# Altium PCB GRAVITAS_ZONE_SENSOR.PcbDoc
Units mil, origin at the board's own origin, x right, y up, seen from the top; angles counter-clockwise.
Board outline 1575 x 2750 mil, 4 copper layers (Top Layer, Power, Ground, Bottom Layer), stack 23.756 mil thick; 83 components, 49 nets, 274 pads, 107 vias.
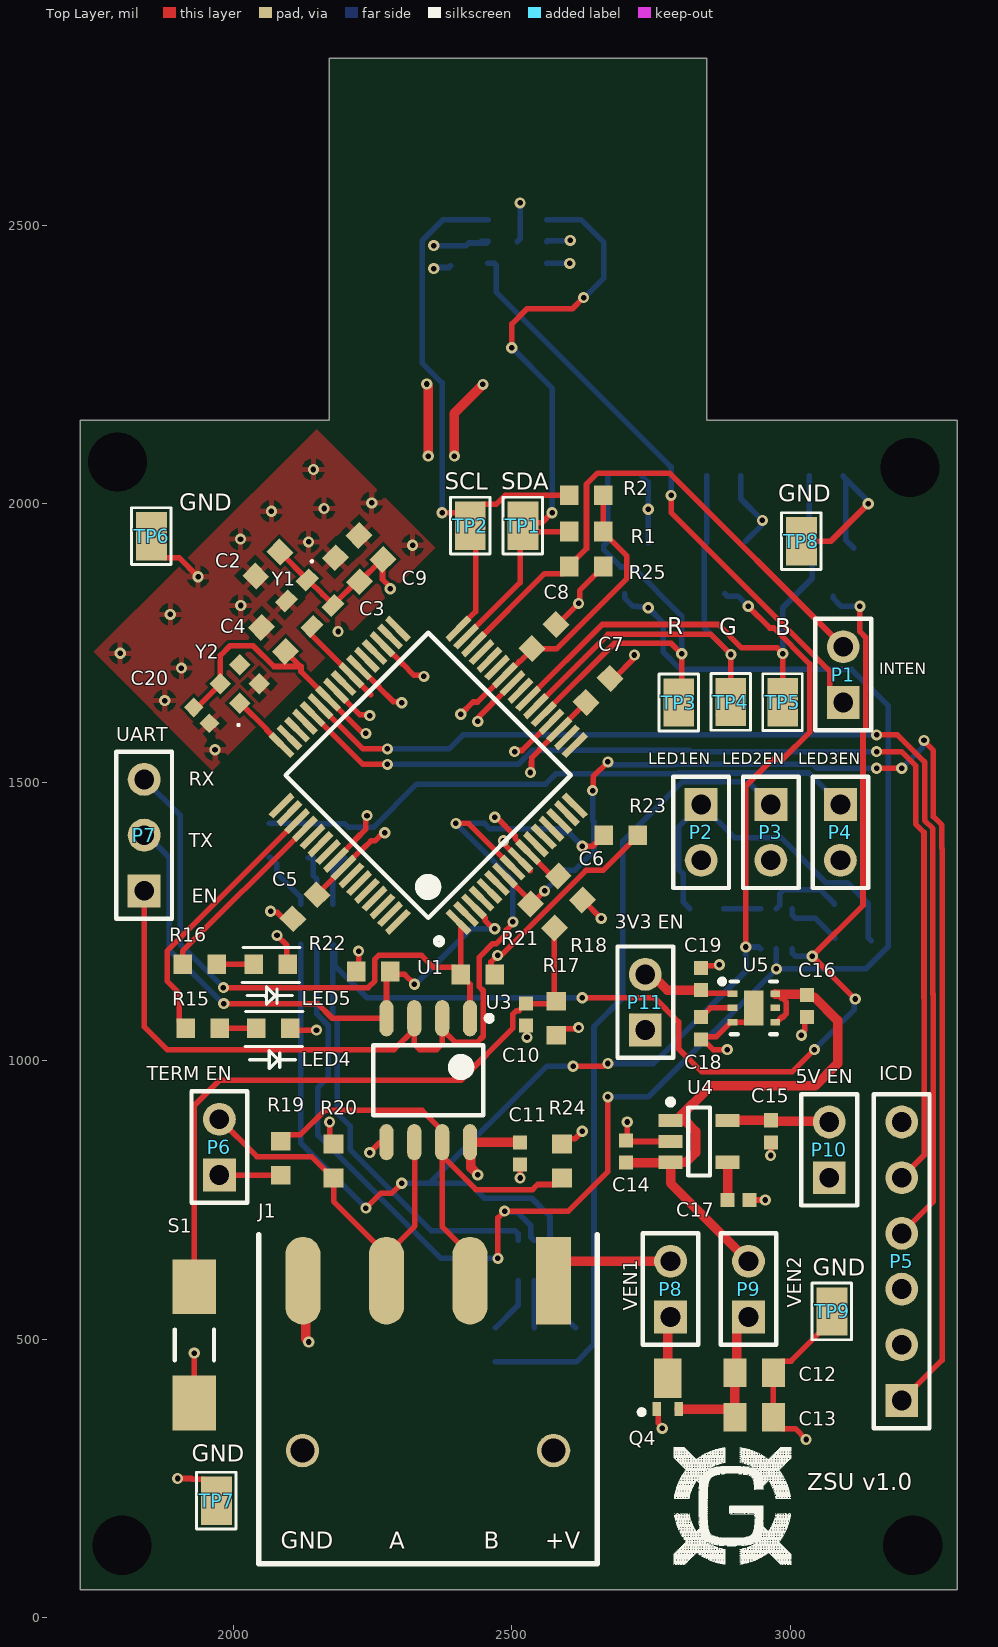
[diagram p0: Top Layer view]
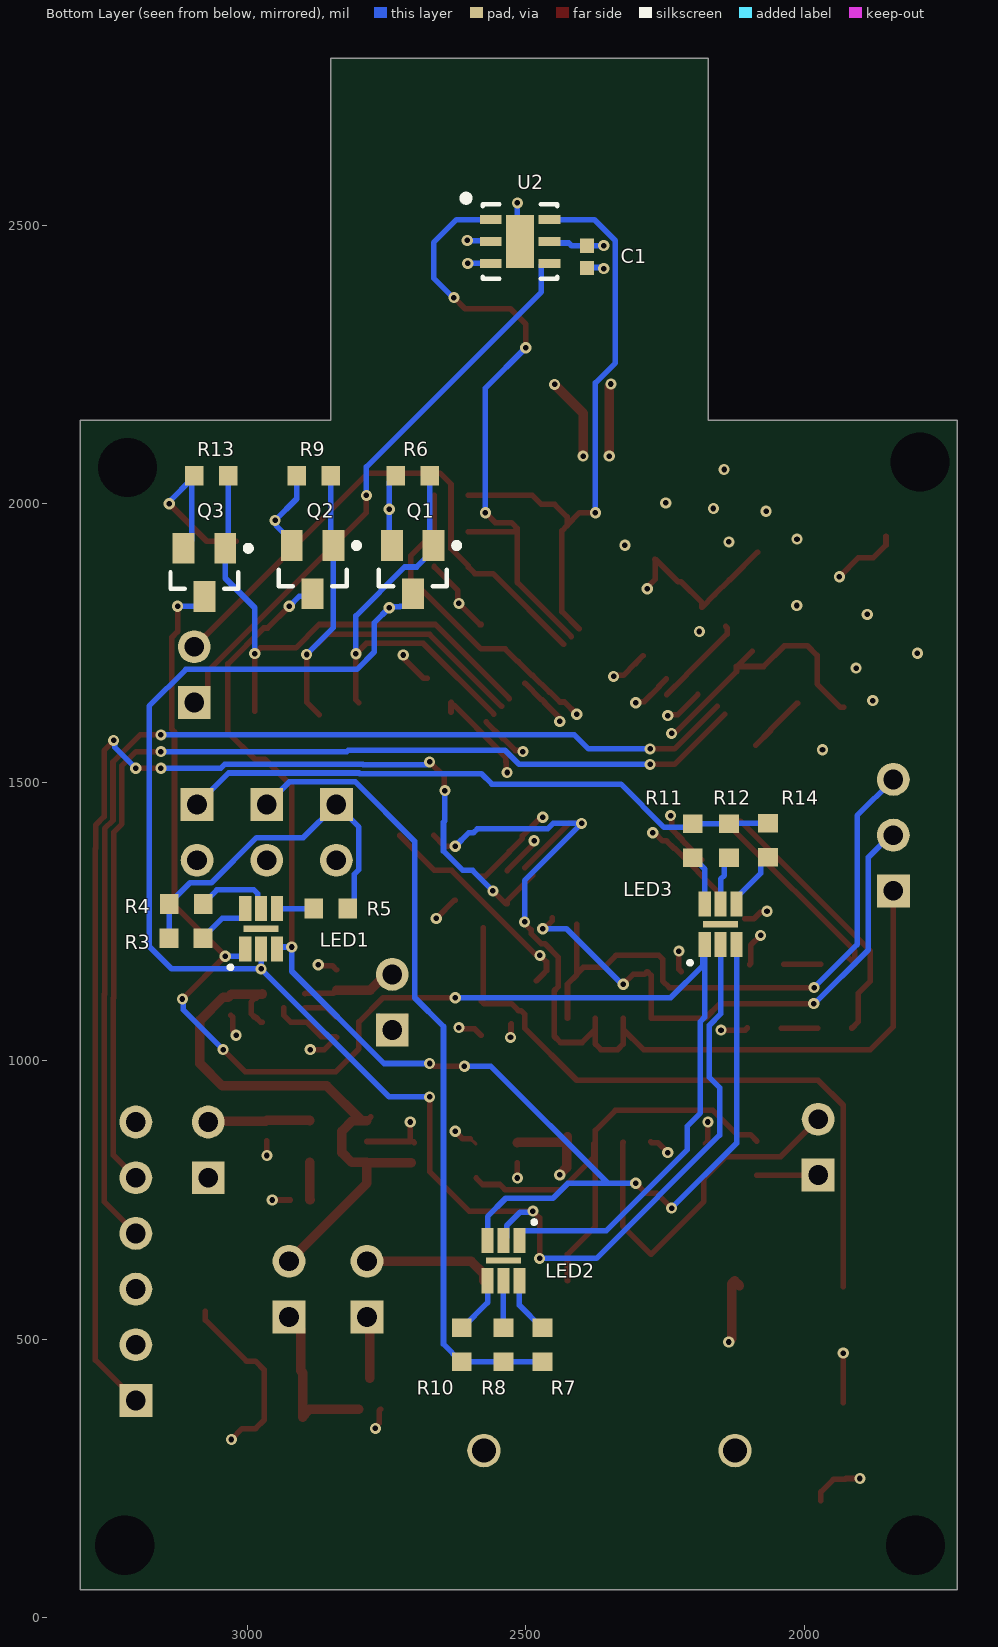
[diagram p1: Bottom Layer view, seen from below]
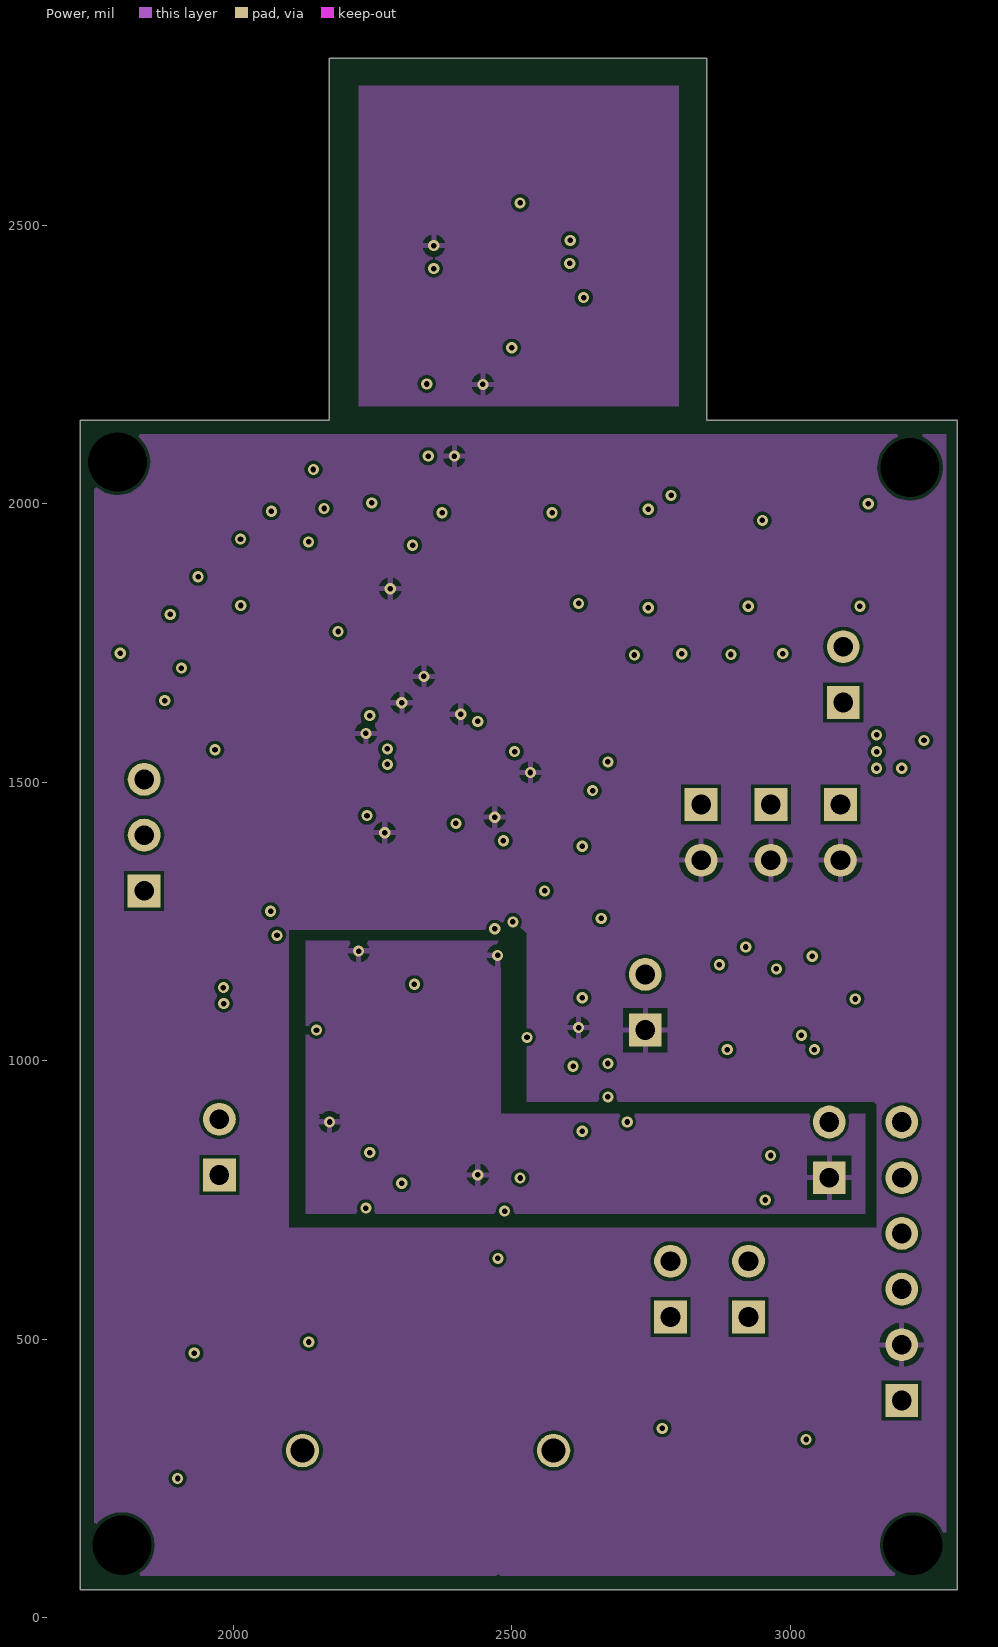
[diagram p2: Power]
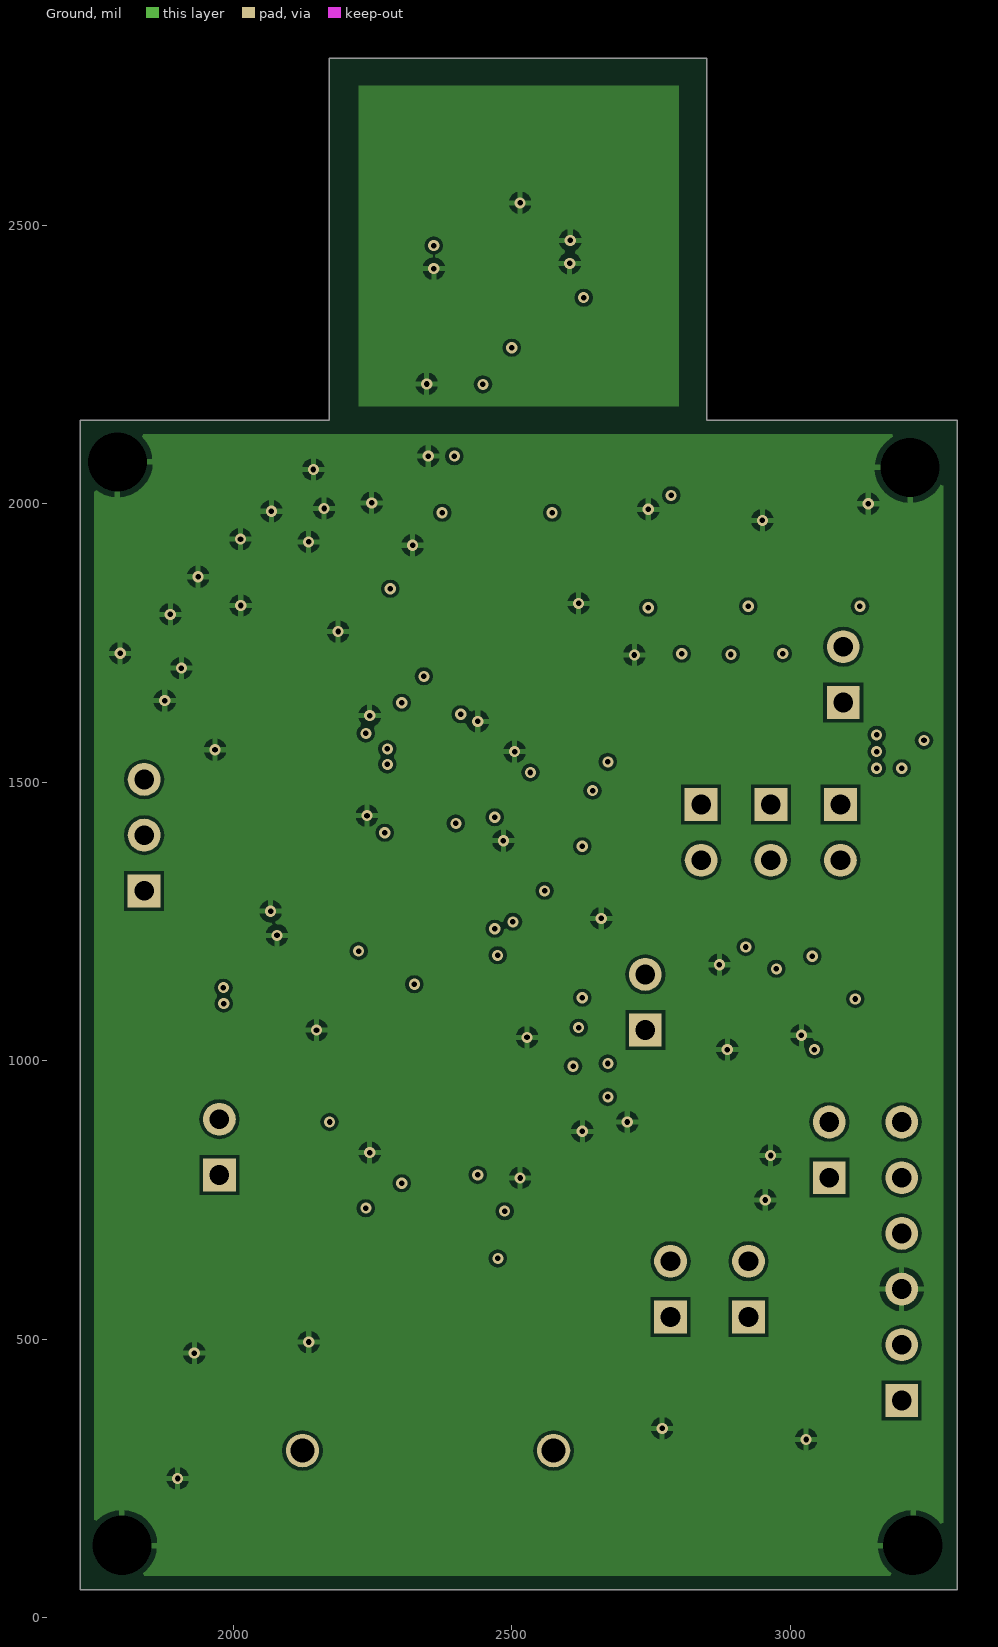
[diagram p3: Ground]

## Layer stack, top to bottom
Top Solder: solder mask 0.4, Solder Resist, Dk 3.5
Top Layer: signal copper 1.4
Dielectric 2: prepreg 2.8, PP-006, Dk 4.1
Power: signal copper 1.3778
Dielectric 1: dielectric 12.6, FR-4, Dk 4.8
Ground: signal copper 1.3778
Dielectric 3: prepreg 2.8, PP-006, Dk 4.1
Bottom Layer: signal copper 1.4
Bottom Solder: solder mask 0.4, Solder Resist, Dk 3.5

## Board outline
1725,50 1725,2150 2171.96,2150 2171.96,2800 2850,2800 2850,2150 3300,2150 3300,50

## Design rules (kind name [scope] priority, off if disabled: settings)
Clearance [All] p1: gap=6 ignorepadtopadclearanceinfootprint=FALSE except(0: Arc-Hole Track-Hole SMDPad-Hole THPad-Hole Via-Hole Fill-Hole Poly-Hole Region-Hole Text-Hole)
DiffPairsRouting "Schematic Differential Pairs Routing_3" [InNet('NetJ1_3')] p1: maxlimit=10 minlimit=10 mostfreqgap=10 toplayer_minwidth=15 toplayer_maxwidth=15 toplayer_prefwidth=15 midlayer1_minwidth=15 midlayer1_maxwidth=15 midlayer1_prefwidth=15 midlayer2_minwidth=15 midlayer2_maxwidth=15 midlayer2_prefwidth=15 bottomlayer_minwidth=15 bottomlayer_maxwidth=15 bottomlayer_prefwidth=15 maxuncoupledlength=500
DiffPairsRouting "Schematic Differential Pairs Routing_2" [InNet('NetJ1_2')] p2: maxlimit=10 minlimit=10 mostfreqgap=10 toplayer_minwidth=15 toplayer_maxwidth=15 toplayer_prefwidth=15 midlayer1_minwidth=15 midlayer1_maxwidth=15 midlayer1_prefwidth=15 midlayer2_minwidth=15 midlayer2_maxwidth=15 midlayer2_prefwidth=15 bottomlayer_minwidth=15 bottomlayer_maxwidth=15 bottomlayer_prefwidth=15 maxuncoupledlength=500
DiffPairsRouting [All] p3: maxlimit=10 minlimit=10 mostfreqgap=10 toplayer_minwidth=15 toplayer_maxwidth=15 toplayer_prefwidth=15 midlayer1_minwidth=15 midlayer1_maxwidth=15 midlayer1_prefwidth=15 midlayer2_minwidth=15 midlayer2_maxwidth=15 midlayer2_prefwidth=15 bottomlayer_minwidth=15 bottomlayer_maxwidth=15 bottomlayer_prefwidth=15 maxuncoupledlength=500
PolygonConnect [All] p1: connectstyle=Relief reliefconductorwidth=10 reliefentries=4 polygonreliefangle="90 Angle" airgapwidth=10
RoutingVias [All] p1: holewidth=10 width=20 viastyle="Through Hole" minholewidth=10 minwidth=20 maxholewidth=50 maxwidth=60
SolderMaskExpansion [All] p1: expansion=4
Width [All] p1: maxlimit=17 minlimit=6 preferedwidth=10 midlayer1_minwidth=10 midlayer1_maxwidth=10 midlayer2_minwidth=10 midlayer2_maxwidth=10 minimp=50.000000 maximp=50.000000 favimp=50.000000
29 further rules are at their usual default settings.

## Classes and differential pairs
component class VREG_RS485_ZS: C11 C12 C13 C14 C15 C16 C17 C18 C19 J1 P6 P7 P8 P9 P10 P11 Q4 R19 R20 R21 R22 R23 R24 TP6 TP7 TP8 TP9 U3 U4 U5
component class MCU_SUPPORT_ZS: C2 C3 C4 C5 C6 C7 C8 C9 C10 C20 LED4 LED5 P5 R15 R16 R17 R18 S1 Y1 Y2
component class LEDS_SENSOR_ZS: C1 LED1 LED2 LED3 P1 P2 P3 P4 Q1 Q2 Q3 R1 R2 R3 R4 R5 R6 R7 R8 R9 R10 R11 R12 R13 R14 R25 TP1 TP2 TP3 TP4 TP5 U1 U2

## Components (designator, comment, footprint, x,y, rotation, side; value= is the part's Value field where it differs from the comment)
C1 "0.1uF" NonPolar-0402 2390,2445 r90 bottom
C2 "0.1uF" NonPolar-0603 2061.94,1891.44 r45 top
C3 "0.1uF" NonPolar-0603 2204.85,1881.44 r315 top
C4 "0.1uF" NonPolar-0603 2071.94,1756.44 r315 top
C5 "0.1uF" NonPolar-0603 2128.42,1276.46 r45 top
C6 "0.1uF" NonPolar-0603 2605,1310 r135 top
C7 "0.1uF" NonPolar-0603 2655,1665 r225 top
C8 "0.1uF" NonPolar-0603 2557.93,1761.58 r225 top
C9 "0.1uF" NonPolar-0603 2246.94,1921.44 r315 top
C10 "100nF" NonPolar-0402 2525.64,1084.54 r90 top
C11 "0.1uF" NonPolar-0402 2515,835 r90 top
C12 "10uF" NonPolar-0805 2935,440 r180 top
C13 "10uF" NonPolar-0805 2935,360 r180 top
C14 "1uF" NonPolar-0402 2705.35,835 r270 top
C15 "4.7uF" NonPolar-0402 2965,875 r90 top
C16 "1uF" NonPolar-0402 3029.69,1100 r90 top
C17 "10nF" NonPolar-0402 2905,750 r180 top
C18 "0.01uF" NonPolar-0402 2839.69,1060 r90 top
C19 "2.2uF" NonPolar-0402 2839.69,1145 r270 top
C20 "0.1uF" NonPolar-0402 1941.94,1621.44 r135 top
J1 "1824653" 1824653 2575,605.12 r180 top
LED1 "RGB_LED_19-337" RGB_LED_19-337 2975,1236.92 r90 bottom
LED2 "RGB_LED_19-337" RGB_LED_19-337 2540,641.22 r270 bottom
LED3 "RGB_LED_19-337" RGB_LED_19-337 2150,1245 r90 bottom
LED4 "LED-0603" LED-0603 2070,1058.35 r0 top
LED5 "LED-0603" LED-0603 2065,1173.35 r0 top
P1 "Header 2" HDR1X2 3095,1643.24 r90 top
P2 "Header 2" HDR1X2 2840,1460 r270 top
P3 "Header 2" HDR1X2 2965,1460 r270 top
P4 "Header 2" HDR1X2 3090,1460 r270 top
P5 "Header 6" HDR1X6 3200,390 r90 top
P6 "Header 2" HDR1X2 1975,795 r90 top
P7 "Header 3" HDR1X3 1840,1305 r90 top
P8 "Header 2" HDR1X2 2785,540 r90 top
P9 "Header 2" HDR1X2 2925,540 r90 top
P10 "Header 2" HDR1X2 3070,790 r90 top
P11 "Header 2" HDR1X2 2739.69,1055 r90 top
Q1 "BSS138" BSS138-SOT23 2702.6,1881.69 r270 bottom
Q2 "BSS138" BSS138-SOT23 2882.6,1881.69 r270 bottom
Q3 "BSS138" BSS138-SOT23 3076.81,1876.69 r270 bottom
Q4 "P_Channel_DMG3415UFY4Q-7" P_Channel_DMG3415UFY4Q-7_attempt1 2780,410 r90 top
R1 "5k" NonPolar-0603 2633.42,1950 r0 top
R2 "5k" NonPolar-0603 2633.42,2015 r0 top
R3 "12R" NonPolar-0603 3110,1220 r180 bottom
R4 "47R" NonPolar-0603 3109.49,1281.22 r180 bottom
R5 "12R" NonPolar-0603 2850,1273.14 r0 bottom
R6 "10k" NonPolar-0603 2702.6,2050 r180 bottom
R7 "12R" NonPolar-0603 2470,490 r90 bottom
R8 "47R" NonPolar-0603 2540,490 r90 bottom
R9 "10k" NonPolar-0603 2880.51,2050 r180 bottom
R10 "12R" NonPolar-0603 2615,490 r90 bottom
R11 "12R" NonPolar-0603 2200,1395 r270 bottom
R12 "47R" NonPolar-0603 2135,1395 r270 bottom
R13 "10k" NonPolar-0603 3064.34,2050 r180 bottom
R14 "12R" NonPolar-0603 2065,1395.51 r270 bottom
R15 "220R" NonPolar-0603 1945,1058.35 r0 top
R16 "220R" NonPolar-0603 1939.49,1173.35 r0 top
R17 "10k" NonPolar-0603 2580,1076.22 r270 top
R18 "220R" NonPolar-0603 2555,1260 r315 top
R19 "120R" NonPolar-0603 2085,825 r90 top
R20 "20k" NonPolar-0603 2180,820 r90 top
R21 "10k" NonPolar-0603 2438.92,1155 r0 top
R22 "10k" NonPolar-0603 2251.34,1160 r180 top
R23 "10k" NonPolar-0603 2695.88,1405 r0 top
R24 "20k" NonPolar-0603 2590,820 r270 top
R25 "10k" NonPolar-0603 2633.42,1887.27 r180 top
S1 "Switch-147873-1" "Switch - 147873-1" 1930,490 r270 top
TP1 "TestPoint" "TP - S2751-46R" 2520,1960.58 r90 top
TP2 "TestPoint" "TP - S2751-46R" 2425.67,1960.58 r90 top
TP3 "TestPoint" "TP - S2751-46R" 2800,1642.93 r90 top
TP4 "TestPoint" "TP - S2751-46R" 2893.35,1643.94 r90 top
TP5 "TestPoint" "TP - S2751-46R" 2986.49,1643.42 r90 top
TP6 "TestPoint" "TP - S2751-46R" 1853.18,1941.44 r90 top
TP7 "TestPoint" "TP - S2751-46R" 1970,210 r90 top
TP8 "TestPoint" "TP - S2751-46R" 3020,1932.64 r90 top
TP9 "TestPoint" "TP - S2751-46R" 3075,550 r90 top
U1 "PIC32MK0512GPD064-I/PTX" V2_PIC32MK0512GPD064IPT 2349.84,1512.4 r135 top
U2 "HDC2080" HDC2080 2510,2470.73 r180 bottom
U3 "MAX485CSA+" MAXM-MAX485CSA+-8_M 2350,965 r270 top
U4 "5V_LDO_LP2992IM5-5.0/NOPB" LP2992IM5-5.0/NOPB 2836.18,855 r0 top
U5 "3V3_LDO_TPS73533" TPS73533DRVT 2934.69,1095 r0 top
Y1 "12MHz_DSC1001DE2-012.0000" 12MHz_DSC1001DE2-012.0000 2136.94,1821.44 r315 top
Y2 "32.768kHz_DSC6083JE2A-032K768" 32.768kHz_DSC6083JE2A-032K768 2072.98,1680.62 r45 top

## Footprints (in the part's own frame and the unit in brackets; to place one, negate y for a bottom-side part, rotate by r counter-clockwise, add the part's x,y. Pads: shape width x height; smd on the part's side, far side on the other; paste and mask are expansions set on the pad)
12MHz_DSC1001DE2-012.0000 [mm]
  rect 0.65x0.85 smd: 1(-0.825,0.675) 2(-0.825,-0.675) 3(0.825,-0.675) 4(0.825,0.675)
  silkscreen extent -1.32,1.38 -1.23,1.47, body extent -1.28,-1.02 1.27,1.03, height 0.9
32.768kHz_DSC6083JE2A-032K768 [mm]
  rect 0.7x0.7 smd: 1(-1.8,0.4) 2(-0.55,0.4) 3(-0.55,1.65) 4(-1.8,1.65)
  silkscreen extent -2.59,-0.3 -2.49,-0.2, body extent -2.42,0.02 0.08,2.02, height 0.89
1824653 [mm]
  rect 1.6x4 smd: 1(0,0)
  oval 1.6x4 smd: 2(3.81,0) 3(7.62,0) 4(11.43,0)
  round 1.524 hole 1.1: 5(0,7.75) 6(11.45,7.75)
  silkscreen extent -2,-2.1 13.45,12.9, body extent -1.98,-2.21 13.45,12.96, height 7.7
BSS138-SOT23 [mm]
  rect 1.4x1 smd: 1(-1.1,0.95) 2(-1.1,-0.95) 3(1.1,0)
  silkscreen extent -1.22,-1.55 0.75,2.12, body extent -1.42,-1.5 1.42,1.5, height 1.2
HDC2080 [mm] "SON, 6-Leads, Body 3.00x3.00mm, Pitch 1.00mm, Thermal Pad 2.40x1.28mm, IPC Medium Density"
  rect 1x0.4 smd: 1(-1.34,1) 2(-1.34,0) 3(-1.34,-1) 4(1.34,-1) 5(1.34,0) 6(1.34,1)
  rect 1.28x2.4 smd: 7(0,0)
  silkscreen extent -2.67,-1.7 1.7,2.17, body extent -1.55,-1.55 1.55,1.55, height 0.8
HDR1X2 [mm] "Connector; Header; 2 Position"
  rect 1.5x1.5 hole 0.9: 1(0,0)
  round 1.5 hole 0.9: 2(2.54,0)
  silkscreen extent -1.27,-1.27 3.81,1.27
HDR1X3 [mm] "Connector; Header; 3 Position"
  rect 1.5x1.5 hole 0.9: 1(0,0)
  round 1.5 hole 0.9: 2(2.54,0) 3(5.08,0)
  silkscreen extent -1.27,-1.27 6.35,1.27
HDR1X6 [mm] "Connector; Header; 6 Position"
  rect 1.5x1.5 hole 0.9: 1(0,0)
  round 1.5 hole 0.9: 2(2.54,0) 3(5.08,0) 4(7.62,0) 5(10.16,0) 6(12.7,0)
  silkscreen extent -1.27,-1.27 13.97,1.27
LED-0603 [mm]
  rect 0.85x0.9 smd: 1(-0.725,0) 2(0.825,0)
  silkscreen extent -1.24,-1.84 1.39,0.76, body extent -0.8,-0.45 0.9,0.45, height 0.6
LP2992IM5-5.0/NOPB [mm]
  rect 1.1x0.6 smd: 1(-1.3,0.95) 2(-1.3,0) 3(-1.3,-0.95) 4(1.3,-0.95) 5(1.3,0.95)
  silkscreen extent -1.42,-1.55 0.5,1.92, body extent -1.42,-1.5 1.42,1.5, height 1.2
MAXM-MAX485CSA+-8_M [mm] "SOIC, 8-Leads, Body 5x4mm, Pitch 1.27mm, IPC Low Density"
  oval 1.65x0.65 smd: 1(-2.825,1.905) 2(-2.825,0.635) 3(-2.825,-0.635) 4(-2.825,-1.905) 5(2.825,-1.905) 6(2.825,-0.635) 7(2.825,0.635) 8(2.825,1.905)
  silkscreen extent -2.95,-2.5 1.6,2.91, body extent -2,-2.5 2,2.5, height 1.75
NonPolar-0402 [mm]
  rect 0.64x0.64 smd: 1(-0.55,0) 2(0.46,0)
  body extent -0.55,-0.3 0.55,0.3, height 0.7
NonPolar-0603 [mm] "Chip Resistor, 2-Leads, Body 1.60x0.80mm, IPC Medium Density"
  rect 0.85x0.9 smd: 1(-0.775,0) 2(0.775,0)
  body extent -0.85,-0.45 0.85,0.45, height 0.6
NonPolar-0805 [mm] "Chip Resistor, 2-Leads, Body 2.00x1.20mm, IPC Medium Density"
  rect 1.05x1.3 smd: 1(-0.875,0) 2(0.875,0)
  body extent -1.05,-0.65 1.05,0.65, height 0.6
P_Channel_DMG3415UFY4Q-7_attempt1 [mm] "DFN, 3-Leads, Body 1.51x2.01mm, Pitch 1.40mm, IPC Medium Density"
  rect 0.65x0.4 smd: 1(-0.9,0.5) 2(-0.9,-0.5)
  rect 1.8x1.25 smd: 3(0.5,0)
  silkscreen extent -1.18,1.01 -0.91,1.32, body extent -1.04,-0.79 1.04,0.79, height 0.4
RGB_LED_19-337 [mm]
  rect 1.15x0.55 smd: 1(-0.92,0.725) 2(-0.92,0) 3(-0.92,-0.725) 4(0.92,0.725) 5(0.92,0) 6(0.92,-0.725)
  rect 0.29x1.6 smd: 7(0,0)
  silkscreen extent -1.88,1.27 -1.63,1.53, body extent -0.8,-0.8 0.8,0.8, height 0.2
"Switch - 147873-1" [mm]
  rect 2.5x2 smd: 1(-2.65,0) 2(2.65,0)
  silkscreen extent -0.7,-0.9 0.7,0.9, body extent -3.8,-1.05 3.8,1.05, height 3
"TP - S2751-46R" [mm]
  rect 2.2x1.4 smd: 1(0,0)
  silkscreen extent -1.29,-0.89 1.3,0.91, body extent -1,-0.6 1,0.6, height 1.4
TPS73533DRVT [mm]
  rect 0.45x0.3 smd: 1(-0.975,0.65) 2(-0.975,0) 3(-0.975,-0.65) 4(0.975,-0.65) 5(0.975,0) 6(0.975,0.65)
  rect 0.89x1.6 smd: 7(0,0)
  silkscreen extent -1.58,-1.2 1.05,1.33, body extent -1.05,-1.05 1.05,1.05, height 0.8
V2_PIC32MK0512GPD064IPT [mm]
  rect 1.4x0.3 smd: 1(-5.7,3.75) 2(-5.7,3.25) 3(-5.7,2.75) 4(-5.7,2.25) 5(-5.7,1.75) 6(-5.7,1.25) 7(-5.7,0.75) 8(-5.7,0.25) 9(-5.7,-0.25) 10(-5.7,-0.75) 11(-5.7,-1.25) 12(-5.7,-1.75) 13(-5.7,-2.25) 14(-5.7,-2.75) 15(-5.7,-3.25) 16(-5.7,-3.75) 33(5.7,-3.75) 34(5.7,-3.25) 35(5.7,-2.75) 36(5.7,-2.25) 37(5.7,-1.75) 38(5.7,-1.25) 39(5.7,-0.75) 40(5.7,-0.25) 41(5.7,0.25) 42(5.7,0.75) 43(5.7,1.25) 44(5.7,1.75) 45(5.7,2.25) 46(5.7,2.75) 47(5.7,3.25) 48(5.7,3.75)
  rect 0.3x1.4 smd: 17(-3.75,-5.7) 18(-3.25,-5.7) 19(-2.75,-5.7) 20(-2.25,-5.7) 21(-1.75,-5.7) 22(-1.25,-5.7) 23(-0.75,-5.7) 24(-0.25,-5.7) 25(0.25,-5.7) 26(0.75,-5.7) 27(1.25,-5.7) 28(1.75,-5.7) 29(2.25,-5.7) 30(2.75,-5.7) 31(3.25,-5.7) 32(3.75,-5.7) 49(3.75,5.7) 50(3.25,5.7) 51(2.75,5.7) 52(2.25,5.7) 53(1.75,5.7) 54(1.25,5.7) 55(0.75,5.7) 56(0.25,5.7) 57(-0.25,5.7) 58(-0.75,5.7) 59(-1.25,5.7) 60(-1.75,5.7) 61(-2.25,5.7) 62(-2.75,5.7) 63(-3.25,5.7) 64(-3.75,5.7)
  silkscreen extent -5.85,-4.6 4.6,5.15, body extent -5,-5 5,5, height 1

## Part data
C1 C10 C11 C14 C15 C16 C17 C18 C19 C20: library part "Cap - 0402"
C2 C3 C4 C5 C6 C7 C8 C9: library part "Cap - 0603"
C12 C13: library part "Cap - 0805"
P1 P2 P3 P4 P6 P8 P9 P10 P11: "Header, 2-Pin", LatestRevisionDate=17-Jul-2002, LatestRevisionNote="Re-released for DXP Platform.", Publisher="Altium Limited"
P5: "Header, 6-Pin", LatestRevisionDate=17-Jul-2002, LatestRevisionNote="Re-released for DXP Platform.", Publisher="Altium Limited"
P7: "Header, 3-Pin", LatestRevisionDate=17-Jul-2002, LatestRevisionNote="Re-released for DXP Platform.", Publisher="Altium Limited"
R1 R2 R3 R4 R5 R6 R7 R8 R9 R10 R11 R12 R13 R14 R15 R16 R17 R18 R19 R20 R21 R22 R23 R24 R25: library part "Res - 0603"
TP1 TP2 TP3 TP4 TP5 TP6 TP7 TP8 TP9: "S2751-46R"
U3: library part CMP-2000-05211-1, "Low-Power, Slew-Rate-Limited RS-485/RS-422 Transceiver, 4.75 to 5.25 V, 0 to 70 degC, 8-Pin SOIC, RoHS, Tape and Reel", Digital IC Case Style=SOIC, IC Temperature Range=Commercial, Manufacturer=Maxim, Operating Temperature Max=70degC, Operating Temperature Min=0degC, Operating Temperature Range=0degCto+70degC, Supply Current=500µA, Supply Voltage Max=5.25V, Supply Voltage Min=4.75V, Supply Voltage Range=4.75Vto5.25V, Base Number=485, Data Rate=2.5Mbps, Datasheet URL=https://datasheet.ciiva.com/29306/170071-da-01-en-ic-max485csa-so8-29306144.pdf, Datasheet Version="Rev. 8, 10/2003", Device Marking=MAX485CSA+, Device Type=Transceiver, Driver Case Style=SOIC, IC Generic Number=485, Interface=RS-422/RS-485, Interface Type=RS422,RS485, Line / Bus Driver / Receiver / Transceiver Type=CMOSDifferential, Logic Function Number=485, Manufacturer URL=http://www.maximintegrated.com/, No. of Drivers=1, No. of Pins=8, No. of Receivers=1, Package / Case=SOIC, Transceiver Type=Differential

## Free pads (board coordinates)
  round 60 hole 106.3: 4(1791.94,2075) 5(3215,2065) 6(1800,130) 7(3220,130)

## Via types
v1: diameter 20, hole 10, Top Layer to Bottom Layer, 107 vias

## Nets (pads, with @x,y where several pads share a name; then routed paths per layer and width w, separated by ;. In a path a pad name is that pad's centre, name@x,y a point inside that pad or via, vN(x,y) a via of type N, cw(c..) or ccw(c..) an arc to the next point about the centre after c; other vN are vias at no path point)
3V3DC: C1.2 C2.2 C3.2 C4.2 C5.2 C6.2 C7.2 C8.2 C9.2 C20.2 P2.2 P3.2 P4.2 P5.2 P11.1 R1.2 R2.2 R17.2 U1.10 U1.19 U1.26 U1.35 U1.38 U1.42 U1.57 U2.5 Y1.1 Y1.4 Y2.4 | length 2445
  Top Layer w10: C20.2 1934.75,1634.25 Y2.4 1976.94,1727.87 1994.07,1745 2035.72,1745 2072.99,1707.73 2120.88,1707.73 2121.58,1708.42 ; C2.2 2132.76,1863.77 Y1.1 2134.38,1863.2 2160.82,1836.76 2183.79,1813.79 2183.79,1822.36 2221.3,1859.87 C3.2 2265.73,1899.17 C9.2@2267.82,1899.17 ; C4.2 2119.96,1708.42 2121.58,1708.42 ; C5.2 2150,1298.64 2232.91,1381.56 2234.19,1381.56 2247.28,1394.64 2254.42,1394.64 2269.17,1409.4 v1(2271.87,1409.4) ; v1(2238.06,1587.56) 2236.14,1589.48 2231,1589.48 U1.42 2121.75,1698.73 2121.58,1698.73 2121.58,1708.42 ; 2247.66,1685.45 2260.75,1672.36 2260.75,1671.08 2287.19,1644.64 2300.6,1644.64 v1(2302.51,1642.73) ; C9.2 C9.2@2267.82,1899.17 ; v1(2281.85,1847.43) 2281.85,1850.13 2267.82,1864.16 C9.2@2267.82,1899.17 ; 2289.42,1727.21 2302.51,1714.12 2302.51,1712.84 2303.79,1712.84 2324.72,1691.91 2340.28,1691.91 v1(2342.2,1690) ; v1(2408.41,1622.03) 2430.45,1644.07 2438.47,1644.07 2456.26,1661.87 2457.54,1661.87 U1.26 2488.92,1691.96 2513.82,1716.87 2514.61,1716.87 2537.05,1739.3 2580.29,1739.3 2706.53,1865.54 2706.53,1906.42 2663.94,1949.02 R1.2 R2.2 ; v1(2469.43,1437.23) 2471.34,1435.32 2474.38,1435.32 2506,1403.7 2506,1399.27 2529.4,1375.88 U1.10 2572.42,1331.58 C6.2 ; v1(2533.42,1517.47) 2535.34,1519.38 2535.34,1536.45 2536,1537.11 2536,1544.17 2550.27,1558.44 2550.27,1559.72 ; 2550.28,1559.72 2628.97,1638.42 2633.42,1638.42 C7.2 ; R17.2 2591.73,1057.44 2618.11,1057.44 v1(2620,1059.33) ; C7.2@2634.12,1626.14 C7.2@2634.12,1642.73 ; P11.1@2715.16,1079.53 P11.1 P11.1@2730.39,1045.71 ; P5.2@3190,490 P5.2
  Top Layer w17: v1(2396.87,2085.36) 2396.87,2162.83 v1(2448.23,2214.19)
  Bottom Layer w10: v1(2360,2463.47) 2360.18,2463.29 2389.82,2463.29 C1.2 2417.6,2463.11 2422.56,2468.07 2454.59,2468.07 U2.5 U2.5@2445.43,2470.73 ; P11.1 P11.1@2764.21,1079.53
5VDC: C11.2 P10.1 R20.2 R21.2 R22.2 R23.2 U3.8 | length 695.2
  Top Layer w6: R20.2@2172.84,857.68 R20.2
  Top Layer w10: R20.2@2172.84,857.68 v1(2172.84,890) ; R22.2 2225.01,1164.18 v1(2225.01,1196.92) ; R21.2@2481.16,1143.27 R21.2 2462.68,1161.75 2462.68,1177.32 v1(2474.54,1189.18) 2480.68,1189.18 2633.18,1341.69 2664.07,1341.69 2726.39,1404.02 R23.2 R23.2@2714.66,1393.27 ; P10.1@3045.47,765.47 P10.1
  Top Layer w17: U3.8 2426.64,852.14 2426.64,808.09 2438.92,795.81 v1(2438.92,795) ; U3.8@2425,863.62 2425,857.41 2428.97,853.44 2514.67,853.44 C11.2
6V5DC: C14.2 C16.2 P9.2 U4.1 U4.3 U5.4 U5.6 | length 1086.7
  Top Layer w10: U4.1@2778.19,899.21 U4.1 ; U5.4 2976.02,1069.41 2984.71,1078.09 2986.49,1078.09 2992.93,1084.54 2992.93,1105.46 2985.86,1112.53 2984.08,1112.53 U5.6@2977.26,1119.35
  Top Layer w17: C14.2 2705.71,817.24 2784.65,817.24 U4.3 ; U4.1 U4.1@2794.84,892.4 ; P9.2 2785,780 U4.3 ; U5.6 2973.07,1119.71 2973.43,1119.35 2977.26,1119.35 3028.44,1119.35 C16.2 3033.78,1114.01 3043.27,1114.01 3085,1072.28 3085,995 3045,955 2857.44,955 U4.1@2794.84,892.4 ; U4.3 2812.6,817.6 2830,835 2830,873.31 2810.91,892.4 U4.1@2794.84,892.4
  Bottom Layer w10: P9.2@2917.71,640 P9.2
+V: P8.1 Q4.3 | length 112.4
  Top Layer w17: Q4.3 2780,535 P8.1
GND: C1.1 C2.1 C3.1 C4.1 C5.1 C6.1 C7.1 C8.1 C9.1 C10.1 C11.1 C12.1 C13.1 C14.1 C15.1 C16.1 C17.1 C18.1 C19.1 C20.1 J1.4 LED4.2 LED5.2 P5.3 pad.4 pad.5 pad.6 pad.7 Q1.2 Q2.2 Q3.2 Q4.1 R6.1 R9.1 R13.1 R24.1 R25.1 S1.2 TP6.1 TP7.1 TP8.1 TP9.1 U1.9 U1.20 U1.25 U1.41 U1.56 U2.2 U2.3 U2.7 U3.5 U4.2 U5.3 U5.7 Y1.2 Y2.2 | length 3139.4
  Top Layer w6: R24.1 R24.1@2599.36,859.87 ; C14.1@2705.35,853.11 C14.1@2707.24,855 ; C15.1@2964.65,856.54 C15.1@2965,856.89
  Top Layer w10: TP6.1 1853.18,1925.69 1875.74,1903.13 1902.65,1903.13 v1(1936.94,1868.84) ; v1(1900,250) 1925,250 1926.69,248.31 1947.44,248.31 1970,225.75 TP7.1 ; S1.2 v1(1930,475) ; v1(2066.87,1268.42) 2068.78,1266.51 2078.64,1266.51 2090.26,1254.89 C5.1 ; v1(2078.42,1225) 2096.1,1207.32 2096.1,1174.72 LED5.2 LED5.2@2097.48,1172.36 ; LED4.2@2102.48,1059.33 LED4.2 2105.83,1055 v1(2149.4,1055) ; U1.56 2214.29,1390.77 2218.99,1395.48 2218.99,1396.76 2238.09,1415.85 2238.09,1438.09 v1(2240,1440) ; U1.41@2190.8,1657.52 2226.91,1621.41 2243,1621.41 v1(2244.92,1619.49) ; v1(2244.92,835) 2262.6,852.68 2273.9,852.68 U3.5 U3.5@2275.89,854.67 ; v1(2438.92,1609.15) 2438.92,1615.4 2466.76,1643.24 2465.48,1643.24 2470.18,1647.95 2471.46,1647.95 U1.25 ; v1@2480.68,1395.48 2480.68,1394.2 U1.9@2533.42,1341.45 ; v1@2485,1389.87 v1(2485,1395) ; v1(2505,1555) 2506.91,1556.91 2518.34,1556.91 2539.78,1578.35 2541.06,1578.35 U1.20 ; v1(2515,789.49) C11.1@2515,816.89 ; C10.1@2525.64,1066.43 2526.49,1065.58 2526.49,1042.74 v1(2527.34,1041.89) ; C8.1 2582.16,1783.15 v1(2620,1820.99) 2621.91,1822.9 2621.91,1844.26 2663.94,1886.29 R25.1 ; R24.1@2599.36,859.87 2613.14,859.87 v1(2626.58,873.31) ; C6.1 2627.8,1288.42 v1(2660.64,1255.59) ; C7.1 2683.13,1686.58 2720,1723.44 v1(2720,1728.44) ; C14.1@2700.35,853.11 C14.1@2701.3,854.06 ; v1(2707.24,890) 2707.24,855 U4.2 ; Q4.1 2763.19,371.69 2763.19,349.52 2770,342.71 v1(2770,340) ; C19.1@2839.69,1163.11 2847.02,1170.45 2870.67,1170.45 v1(2872.58,1172.36) ; v1(2886.89,1020) 2861.57,1020 2839.69,1041.89 2841.14,1043.35 2867.28,1043.35 2893.35,1069.41 U5.3 2922.17,1069.41 2934.69,1081.93 U5.7 ; C17.1@2923.11,750 v1(2955,750) ; v1(2964.65,829.88) C15.1@2964.65,856.54 ; v1(3020,1045.71) 3020,1048.41 3025.88,1054.29 3025.88,1078.08 C16.1@3029.69,1081.89 ; TP8.1 3072.64,1932.64 v1(3140,2000) ; v1(3028.44,320) 3009.04,339.41 2985.12,339.41 2969.45,355.08 C13.1 C12.1 2969.45,444.92 2985.12,460.59 3001.34,460.59 3075,534.25 TP9.1
  Top Layer w17: J1.4@2116.2,596.32 J1.4 2130.41,599.71 2130.41,500.88 2135.48,495.81 v1(2135.48,495) ; v1(2347.2,2215) 2347.2,2214.19 2350,2211.38 v1(2350,2085.36)
  Bottom Layer w10: v1(2360,2422.2) 2361.91,2424.11 2387.22,2424.11 C1.1@2390,2426.89 ; U2.7 2515,2475.73 v1(2515,2540) ; U2.3 v1(2603.97,2431.36) ; U2.2 2563.78,2471.75 2603.97,2471.75 v1(2605,2472.78) ; R6.1 2744.84,2038.27 2744.84,1990.16 v1(2745,1990) Q1.2@2745,1930 ; R9.1 2911.02,2008.98 v1(2950,1970) ; Q2.2@2920,1932.87 v1@2948.09,1960.96 ; R13.1 3094.85,2049.02 R13.1@3099.52,2044.34 ; Q3.2 3099.52,1934.69 R13.1@3099.52,2044.34 ; v1(3140,2000) 3138.09,2001.91 3138.09,2005.78 R13.1@3099.52,2044.34
  other v1: 1967.19,1558.33 1876.94,1646.44 1906.91,1704.86 1796.94,1731.44 2188.12,1770.56 1886.94,1801.44 2013.4,1817.26 2321.94,1925.45 2135.26,1931.44 2012.91,1936.44 2068.35,1986.44 2163.09,1991.44 2248.5,2001.44 2143.9,2061.44
NetC10_2: C10.2 R17.1 R18.2 S1.1 | length 1194.6
  Top Layer w10: S1.1 1930,920 1975,965 2408.41,965 2502.04,1058.63 2502.04,1083.58 2508.49,1090.03 2513.02,1090.03 C10.2 R17.1@2574.93,1102.65 ; R18.2 2575.88,1237.73 2575.88,1110.85 R17.1
NetC12_2: C12.2 C13.2 P9.1 Q4.2 | length 292.4
  Top Layer w17: Q4.2 2888.38,374.57 2896.3,366.65 C13.2@2896.3,364.25 ; C13.2 C12.2 2903.97,443.42 2903.97,518.97 P9.1
NetC15_2: C15.2 P10.2 U4.5 | length 184.2
  Top Layer w10: P10.2@3068.44,891.56 P10.2
  Top Layer w17: U4.5 2887.72,892.76 2964.65,892.76 C15.2 2966.56,891.56 P10.2@3068.44,891.56
NetC17_2: C17.2 U4.4 | length 68.5
  Top Layer w10: U4.4@2886.89,817.13 U4.4
  Top Layer w17: C17.2 2887.36,750.47 U4.4
NetC18_2: C18.2 U5.2 | length 63.6
  Top Layer w10: C18.2 2856.57,1095 U5.2
NetC19_2: C19.2 P11.2 U5.1 | length 170.9
  Top Layer w10: C19.2 2845.08,1121.5 2895.39,1121.5 U5.1
  Top Layer w17: P11.2 2751.07,1155 2779.18,1126.89 C19.2
NetJ1_1: J1.1 P8.2 | length 231.4
  Top Layer w17: J1.1 2575,617 2598,640 P8.2
NetJ1_2: J1.2 R19.2 R24.2 U3.7 | length 890.9
  Top Layer w10: R19.2 2096.73,867.24 2120.38,867.24 2164.14,911 2339,911 2375,875 U3.7 ; J1.2 2425,652.36 2375,702.36 2375,826.24 U3.7 ; R24.2@2589.02,789.49 2577.28,777.76 2546.43,777.76 2537.16,768.49 2435.73,768.49 2377.98,826.24 2377.98,850.8 U3.7
NetJ1_3: J1.3 P6.2 R20.1 U3.6 | length 648.1
  Top Layer w10: P6.2 2042.22,827.78 2140.72,827.78 2179.02,789.49 R20.1 2180,747.36 2275,652.36 2326,703.36 2326,852.78 U3.6
NetLED1_1: LED1.1 LED2.1 LED3.1 Q3.3 | length 2786.8
  Top Layer w10: v1(2626.58,1113.04) 2756.26,1113.04 2799.66,1069.64 2799.66,1021.48 2841.14,980 3003.27,980 v1(3043.27,1020) ; v1(3116.5,1110.85) 3116.23,1110.85 v1(3039.41,1187.68) 3130.53,1278.8 3130.53,1590.23 3135.53,1595.23 3135.53,1760.03 3125,1770.56 v1(3125,1815.83)
  Bottom Layer w10: LED2.1 2511.46,689.25 2505.63,695.08 2355.14,695.08 2210.3,839.92 2210.3,882.24 2186.4,906.14 2186.4,1070.33 2178.54,1078.18 LED3.1 2181.89,1205.43 2181.89,1171.14 2240,1113.04 v1(2626.58,1113.04) ; LED1.1 3003.54,1193.5 3009.37,1187.68 v1(3039.41,1187.68) ; v1(3043.27,1020) 3114.59,1091.33 3114.59,1108.94 v1(3116.5,1110.85) ; Q3.3 3076.81,1830.51 3091.49,1815.83 v1(3125,1815.83)
NetLED1_2: LED1.2 LED2.2 LED3.2 Q1.3 | length 2973.7
  Top Layer w10: v1(2475,645) 2475,717.89 v1(2487.11,730) 2601.58,730 2672.47,800.89 v1(2672.47,935)
  Bottom Layer w10: LED3.2 2150,1084.09 2170.4,1063.7 2170.4,970.21 2151.84,951.65 2151.84,866.35 2373.18,645 v1(2475,645) ; v1(2487.11,730) 2489.02,728.09 2509.83,728.09 2534.17,703.75 2534.17,683.27 LED2.2 ; v1(2672.47,935) 2745,935 v1(2975,1165) ; Q1.3 2702.6,1830.51 2717.28,1815.83 2725.16,1815.83 2725.87,1815.12 2743.09,1815.12 v1(2745,1813.2) 2771.61,1786.6 2771.61,1734.23 2803.13,1702.71 3110.14,1702.71 3176,1636.85 3176,1205.48 3135.52,1165 v1(2975,1165) ; LED1.2 v1(2975,1165)
NetLED1_3: LED1.3 LED2.3 LED3.3 Q2.3 | length 2505.5
  Top Layer w10: v1(2238.06,735.28) 2265.1,762.32 2284.83,762.32 v1(2302.51,780) ; v1(2610,990) 2664.77,990 2669.77,995 v1(2672.47,995) ; v1(2920,1204.17) 2920,1492.91 2968.28,1541.19 2986.33,1541.19 3034.62,1589.48 3034.62,1712.6 2970.4,1776.82 2963.48,1776.82 v1(2924.47,1815.83)
  Bottom Layer w10: LED3.3 2121.46,851.88 v1(2238.06,735.28) ; v1(2302.51,780) 2352.61,780 ; LED2.3 2568.54,720.37 2535.83,753.09 2451.13,753.09 2424.22,780 2352.61,780 ; v1(2610,990) 2562.61,990 2352.61,780 ; v1(2672.47,995) 2754.3,995 2920,1160.7 v1(2920,1204.17) 2942.98,1204.17 LED1.3 ; Q2.3 2887.48,1833.5 2906.79,1833.5 v1(2924.47,1815.83)
NetLED1_4: LED1.4 R3.2 | length 105.5
  Bottom Layer w10: LED1.4 3003.54,1261.33 3009.37,1255.5 3044.97,1255.5 3079.49,1220.98 R3.2
NetLED1_5: LED1.5 R4.2 | length 141.1
  Bottom Layer w10: LED1.5 2980.83,1278.96 2980.83,1299.44 2988.16,1306.78 3054.41,1306.78 3078.98,1282.2 R4.2
NetLED1_6: LED1.6 R5.2 | length 65.9
  Bottom Layer w10: R5.2 LED1.6
NetLED2_4: LED2.4 R7.2 | length 102.2
  Bottom Layer w10: R7.2 2470.98,520.51 2511.46,560.98 LED2.4
NetLED2_5: LED2.5 R8.2 | length 84.5
  Bottom Layer w10: R8.2 LED2.5
NetLED2_6: LED2.6 R10.2 | length 104.3
  Bottom Layer w10: LED2.6 2568.54,565.98 2614.02,520.51 R10.2
NetLED3_4: LED3.4 R11.2 | length 92.7
  Bottom Layer w10: LED3.4 2178.54,1344.02 2199.02,1364.49 R11.2
NetLED3_5: LED3.5 R12.2 | length 97.6
  Bottom Layer w10: R12.2 2143.28,1364.49 2143.28,1332.76 2150,1326.04 LED3.5 LED3.5@2147.72,1283.5
NetLED3_6: LED3.6 R14.2 | length 107.7
  Bottom Layer w10: R14.2 2065.98,1365 2077.72,1353.27 2077.72,1336.77 2121.46,1293.03 LED3.6
NetLED4_1: LED4.1 R15.2 | length 65.9
  Top Layer w10: R15.2 LED4.1
NetLED5_1: LED5.1 R16.2 | length 66.5
  Top Layer w10: R16.2 LED5.1
NetP1_1: P1.1 U2.4 | length 1093.9
  Top Layer w10: v1(2786.1,2015) 2786.1,1983.9 3070.47,1699.53 3070.47,1667.77 P1.1
  Ground w10: P1.1 P1.1@3119.53,1667.77
  Bottom Layer w10: U2.4 2469.06,2431.36 2471.93,2428.48 2471.93,2380.18 2786.1,2066.01 v1(2786.1,2015)
NetP1_2: P1.2 R25.2 U1.30 | length 988.4
  Top Layer w10: U1.30 2558.88,1874.55 2591.18,1874.55 2602.91,1886.29 R25.2 2602.91,1888.26 2634.12,1919.46 2634.12,2035.19 2653.93,2055 2783.24,2055 P1.2
NetP2_1: P2.1 R3.1 R4.1 R5.1 | length 654.3
  Bottom Layer w10: R5.1 2807.76,1284.87 2807.76,1334.93 2799.47,1343.21 2799.47,1419.47 P2.1 2899.47,1400.53 2983.28,1400.53 3064.34,1319.47 3102.73,1319.47 3140,1282.2 R4.1 3140,1220.51 R3.1 R3.1@3145,1215.51
NetP3_1: P3.1 R7.1 R8.1 R10.1 | length 1476.3
  Power w10: P3.1 P3.1@2989.53,1435.47
  Bottom Layer w10: R7.1 R8.1 R10.1 2615.98,459.49 2647.58,491.08 2647.58,1061.45 2699.16,1113.04 2699.16,1393.77 2805.92,1500.53 2924.47,1500.53 P3.1
NetP4_1: P4.1 R11.1 R12.1 R14.1 | length 1091.7
  Bottom Layer w10: R14.1 2134.49,1426.02 R12.1 R11.1 2206.51,1419 2251.78,1419 2329.25,1496.47 2560.83,1496.47 2579.8,1515.45 2798.21,1515.45 2799.29,1516.53 3033.47,1516.53 P4.1
NetP5_1: P5.1 R18.1 U1.7 | length 2224.5
  Top Layer w10: U1.7 2533.42,1287.05 R18.1 2535.45,1281.58 v1(2558.88,1305) ; v1(2645,1485) 2646.03,1486.03 2646.03,1510 v1(2672.47,1536.45) ; v1(3155,1525) v1(3200,1525) ; P5.1 3272.53,462.53 3272.53,1381.03 3272,1381.56 3272,1423.25 3257,1438.25 3257,1556.64 3240,1573.64 v1(3240,1575)
  Bottom Layer w10: v1(2558.88,1305) 2595.48,1341.61 2612.88,1341.61 2647.58,1376.3 2647.58,1428.01 2645,1430.59 v1(2645,1485) ; v1(2672.47,1536.45) 2677.47,1531.45 2791.58,1531.45 2792.66,1532.53 3040.1,1532.53 3047.63,1525 v1(3155,1525) ; v1(3200,1525) 3238.09,1563.09 3238.09,1573.09 v1(3240,1575)
NetP5_4: P5.4 U1.43 | length 2023.2
  Top Layer w10: U1.43 2186.45,1606.19 2232.91,1559.72 v1(2276.56,1559.72) ; v1(3155,1585) 3192.33,1585 3241,1536.33 3241,1431.63 3256,1416.63 3256,1119.57 3256.53,1119.04 3256.53,746.53 P5.4
  Bottom Layer w10: v1(2276.56,1559.72) 2387.22,1559.72 2412.5,1585 v1(3155,1585)
NetP5_5: P5.5 U1.44 | length 1905
  Top Layer w10: U1.44 2172.53,1592.27 2232.91,1531.89 v1(2276.56,1531.89) ; v1(3155,1555) 3199.7,1555 3225,1529.7 3225,1425 3240,1410 3240,1112.94 3240.53,1112.42 3240.53,830.53 P5.5
  Bottom Layer w10: v1(2276.56,1531.89) 2511.58,1531.89 2537.14,1557.45 2818.5,1557.45 2820.94,1555 v1(3155,1555)
NetP6_1: P6.1 R19.1 | length 110.2
  Top Layer w10: P6.1 1975.51,794.49 R19.1
NetP7_1: P7.1 R23.1 U1.8 U3.2 U3.3 | length 1882.2
  Top Layer w10: P7.1 1840,1061.24 1881.24,1020 2288.46,1020 U3.3@2325,1056.54 ; U3.3 U3.3@2325,1056.54 ; U3.2 U3.2@2375,1056.54 ; v1(2399.64,1426.02) 2422.29,1426.02 U1.8 ; v1(2502.04,1249.32) 2502.04,1246.62 2490.43,1235.01 2490.43,1228.22 2472.39,1210.18 2465.84,1210.18 2441.7,1186.04 2441.7,1132.73 2448.8,1125.63 2448.8,1043.91 2437.62,1032.74 2398.8,1032.74 U3.2@2375,1056.54 ; v1(2626.58,1385) 2645.37,1385 R23.1 ; U3.3@2325,1056.54 2325,1029.72 2334.72,1020 2365,1020 2375,1030 U3.2@2375,1056.54
  Bottom Layer w10: v1(2502.04,1249.32) 2502.04,1323.62 v1(2399.64,1426.02) 2450.94,1426.02 2460.73,1416.23 2586.87,1416.23 2593.71,1409.4 2602.18,1409.4 v1(2626.58,1385)
NetP7_2: P7.2 R22.1 U1.3 U3.4 | length 1021.2
  Top Layer w10: v1(1982.81,1102.65) 2151.25,1102.65 2177.68,1076.22 U3.4 2275,1153.15 R22.1 2286.75,1155.1 2307.32,1155.1 v1(2325,1137.42) ; 2452.7,1256.42 2452.7,1251.02 2466.81,1236.92 v1(2469.43,1236.92)
  Bottom Layer w10: P7.2 1845,1405 1885,1365 1885,1198.92 1981.28,1102.65 v1(1982.81,1102.65) ; v1(2325,1137.42) 2327.58,1137.42 2427.07,1236.92 v1(2469.43,1236.92)
NetP7_3: P7.3 R21.1 U1.1 U3.1 | length 1097.6
  Top Layer w10: v1(1982.34,1131.28) 2242.11,1131.28 2254.12,1143.29 2254.12,1182.27 2261.03,1189.18 2337.9,1189.18 2359.37,1167.72 2396.68,1167.72 R21.1@2408.41,1155.98 ; U1.1@2408.41,1245.04 R21.1@2408.41,1155.98 ; U3.1 2425,1137.42 2408.41,1154.02 R21.1 R21.1@2408.41,1155.98
  Bottom Layer w10: P7.3@1838.16,1503.16 P7.3 1905,1440 1905,1208.62 v1(1982.34,1131.28)
NetQ1_1: Q1.1 R6.2 TP3.1 U1.21 | length 790.7
  Top Layer w10: U1.21 2684.31,1749.44 2786.1,1749.44 v1(2805,1730.54) 2805,1647.93 TP3.1
  Bottom Layer w10: R6.2 2672.09,1931.89 Q1.1 2665.2,1917.13 2695.88,1886.44 2717.34,1886.44 2805,1798.78 v1(2805,1730.54)
NetQ2_1: Q2.1 R9.2 TP4.1 U1.22 | length 878.4
  Top Layer w10: U1.22 2672.47,1765.44 2857.26,1765.44 v1(2893.35,1729.36) TP4.1 TP4.1@2870.79,1621.39
  Bottom Layer w10: R9.2 2850,1929.8 Q2.1 2845.2,1777.51 v1(2893.35,1729.36)
NetQ3_1: Q3.1 R13.2 TP5.1 U1.23 | length 980.3
  Top Layer w10: U1.23 2662.34,1783.15 2870.87,1783.15 2912.75,1741.27 2976.25,1741.27 v1(2986.49,1731.04) TP5.1 TP5.1@2986.49,1627.68
  Bottom Layer w10: v1(2986.49,1731.04) 2986.49,1813.2 3039.41,1866.13 Q3.1 3033.82,1925.58 R13.2
NetR1_1: R1.1 TP1.1 U1.31 U2.1 | length 1137.9
  Top Layer w10: U1.31 2515,1858.52 2515,1955.58 2520.58,1950 R1.1 ; v1(2500,2280) 2500,2322.66 2527.34,2350 2608.97,2350 v1(2628.97,2370) ; TP1.1 2525.64,1966.22 2554.74,1966.22 v1(2572.42,1983.9)
  Bottom Layer w10: v1(2500,2280) 2572.42,2207.58 v1(2572.42,1983.9) ; U2.1 2623.94,2510.1 2665.2,2468.84 2665.2,2405 2630.2,2370 v1(2628.97,2370)
NetR2_1: R2.1 TP2.1 U1.32 U2.6 | length 1107.9
  Top Layer w10: v1(2375,1983.9) 2403.11,1983.9 TP2.1@2425.67,1961.34 ; U1.32 2435,1806.36 2435,1951.25 TP2.1 TP2.1@2425.67,1961.34 ; R2.1 2488,2015 2471.88,1998.89 2448.23,1998.89 2425.67,1976.33 TP2.1@2425.67,1961.34
  Bottom Layer w10: v1(2375,1983.9) 2375,2216.89 2339,2252.89 2339,2472.17 2376.93,2510.1 U2.6
NetR15_1: R15.1 U1.51 | length 483.3
  Top Layer w10: R15.1@1914.49,1059.33 R15.1 1902.76,1070.08 1902.76,1121.32 1881.24,1142.83 1881.24,1196.92 U1.51
NetR16_1: R16.1 U1.52 | length 350.5
  Top Layer w10: R16.1@1920.71,1185.08 R16.1 1908.98,1196.82 U1.52
NetU1_39: U1.39 Y1.3 | length 168.6
  Top Layer w10: Y1.3 2138.33,1776.9 2138.33,1765.87 2212.03,1692.17 U1.39 2246.83,1657.16
NetU1_48: U1.48 Y2.1 | length 107
  Top Layer w10: Y2.1 2013.36,1641.64 2060.15,1594.85 2060.15,1593.29 U1.48
pads on no net: J1.5 J1.6 LED1.7 LED2.7 LED3.7 P5.6 U1.2 U1.4 U1.5 U1.6 U1.11 U1.12 U1.13 U1.14 U1.15 U1.16 U1.17 U1.18 U1.24 U1.27 U1.28 U1.29 U1.33 U1.34 U1.36 U1.37 U1.40 U1.45 U1.46 U1.47 U1.49 U1.50 U1.53 U1.54 U1.55 U1.58 U1.59 U1.60 U1.61 U1.62 U1.63 U1.64 U5.5 Y2.3

## Polygon pours and split planes (outlines as drawn)
3V3DC on Power "Power-3V3DC" (solid, pour order 22): 2474.54,700 2474.54,75.46 2475,75 1750,75 1750,2125 3280,2125 3280,75 2475,75 2475,699.54 2474.54,700 3155,700 3155,921.24 3150,926.24 2526.54,926.24 2526.54,1228.46 2515,1240 2510,1235 2100,1235 2100,700
5VDC on Power "Power-5VDC" (solid, pour order 10): 2130,905 2130,725 3135,725 3135,905
3V3DC on Power "Power-3V3DC 1" (solid, pour order 18): 2225,2750 2225,2175 2800,2175 2800,2750
5VDC on Power "Power-5VDC 1" (solid, pour order 12): 2130,905 2130,1215 2480,1215 2480,905
GND on Ground "Ground-GND" (solid, pour order 14): 3275,75 3275,2125 1755,2125 1750,2130 1750,75
GND on Ground "Ground-GND 1" (solid, pour order 16): 2225,2175 2800,2175 2800,2750 2225,2750
GND on Top Layer "Top Layer-GND" (solid, pour order 0): 1962.52,1520.86 1749.44,1733.94 2149.44,2133.94 2362.52,1920.86

## Silkscreen, mask and mechanical layers (free items; w line width, h text height)
Top Overlay:
  region: 18874 vertices and 1758 holes, not listed, extent 2790.89,94.75 3002.13,305.7
  text "SCL" at 2380,2025 h30
  text "SDA" at 2480.68,2025 h30
  text "GND" at 2978.44,2003.75 h30
  text "GND" at 1902.65,1987.02 h30
  text "R" at 2779.18,1765.44 h30
  text "G" at 2872.58,1764.15 h30
  text "B" at 2973.07,1764.15 h30
  text "INTEN" at 3160,1694.11 h20
  text "UART" at 1790,1573.28 h25
  text "LED1EN" at 2745,1531.89 h20
  text "LED2EN" at 2877.6,1531.89 h20
  text "LED3EN" at 3014.69,1531.89 h20
  text "RX" at 1920,1493.28 h25
  text "TX" at 1920,1383.28 h25
  text "EN" at 1925,1283.28 h25
  text "3V3 EN" at 2685,1236.92 h25
  text "TERM EN" at 1844.4,965 h25
  text "ICD" at 3160,965 h25
  text "5V EN" at 3010,960 h25
  text "GND" at 3040,613.75 h30
  text "VEN2" at 3020,556.18 h25 r90
  text "VEN1" at 2725,551.18 h25 r90
  text "GND" at 1925,280 h30
  text "ZSU v1.0" at 3030,229.29 h30
  text "GND" at 2085,123.75 h30
  text "A" at 2280,123.75 h30
  text "B" at 2450,123.75 h30
  text "+V" at 2560,123.75 h30
Mechanical 15:
  lines w7.87: 1725,50 1725,2150 2171.96,2150 2171.96,2201.96 2171.96,2800 2850,2800 2850,2195 2850,2150 3300,2150 3300,50 1725,50